# EAGLE board twip-mb-mirror (EAGLE 9.2.2)
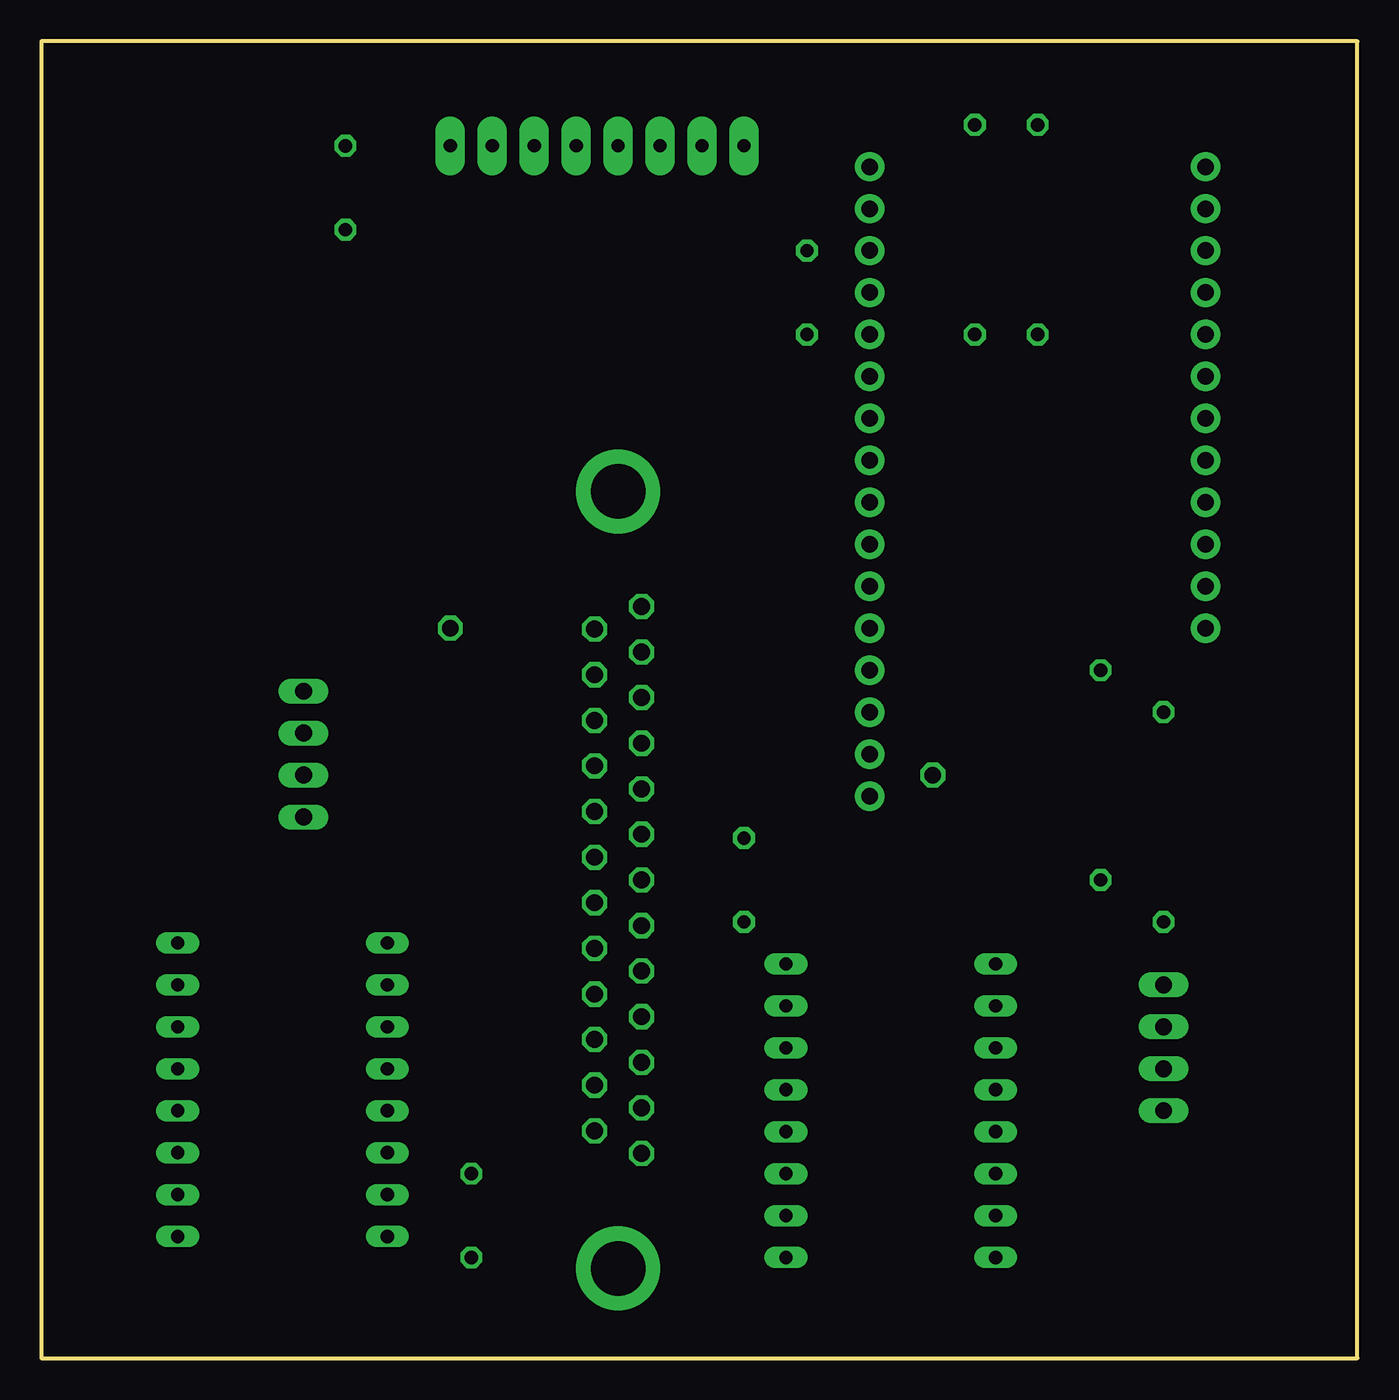
[diagram p0: board, top side]
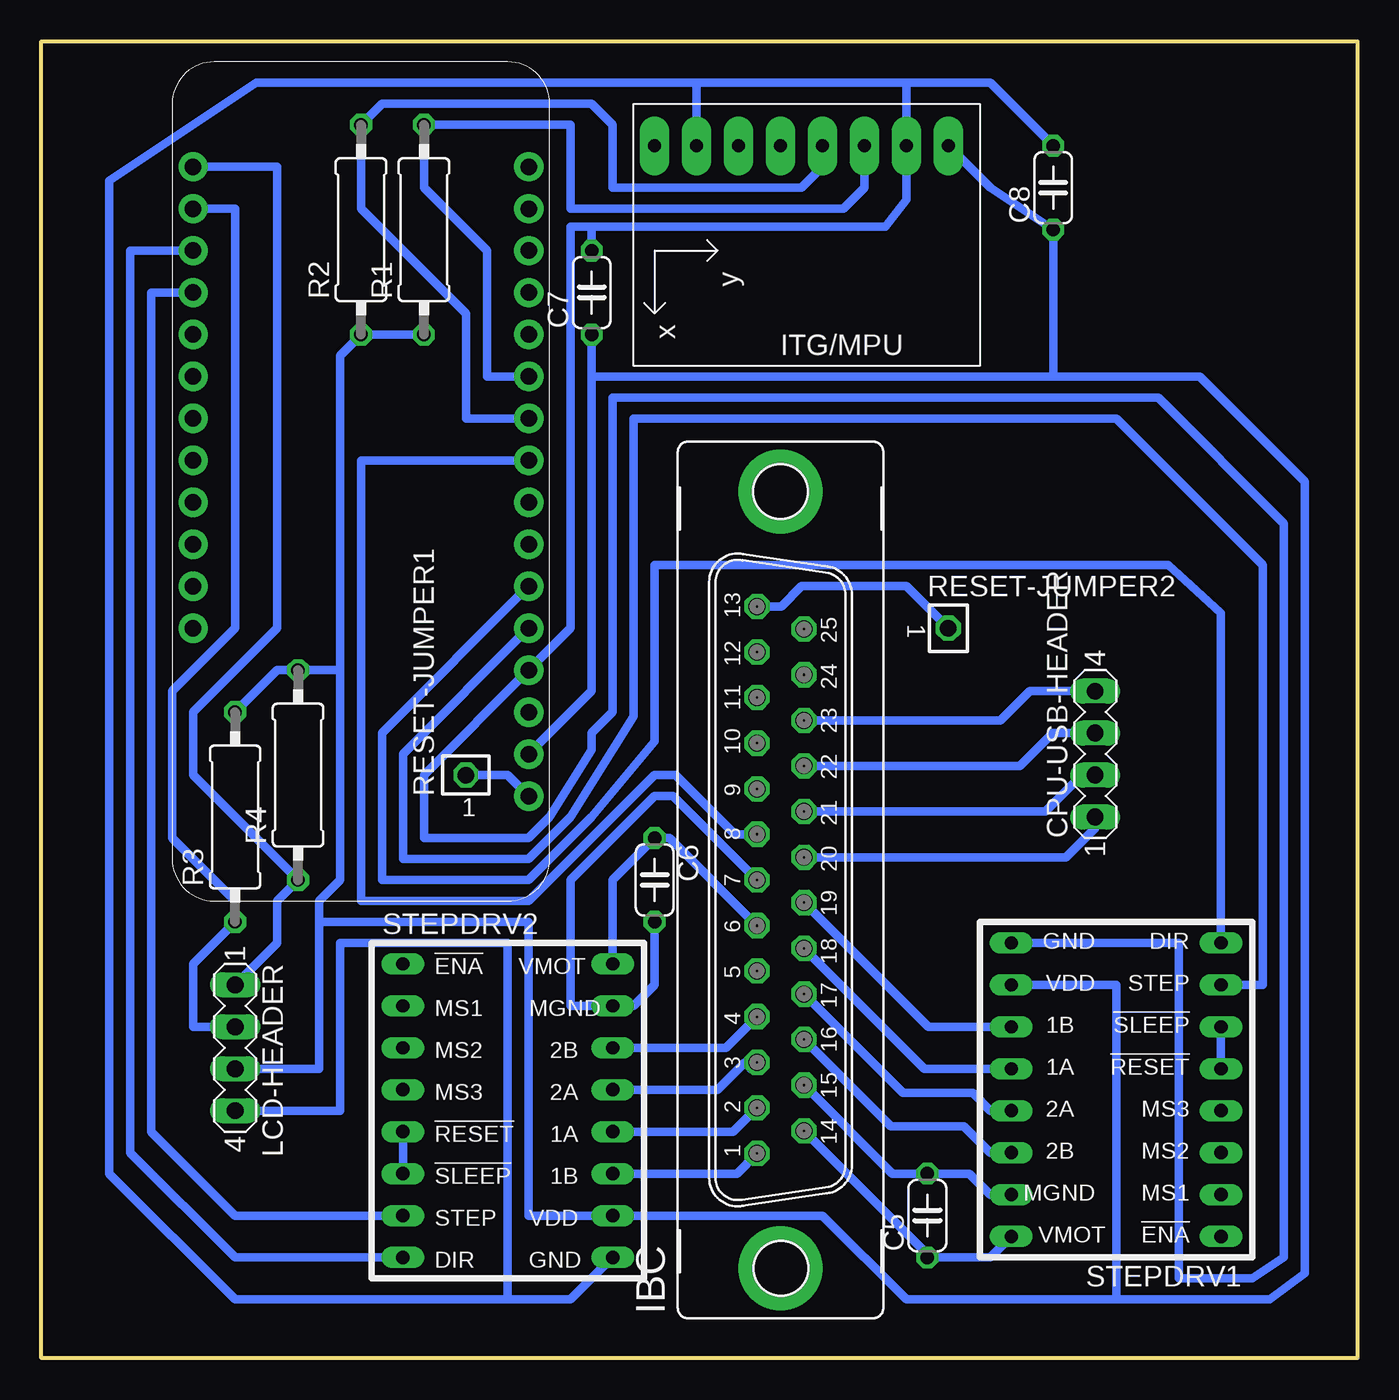
[diagram p1: board, bottom side, seen from below]

Size 79.68 x 79.73 mm. Coordinates in mm from the lower left corner, seen from the top.
Outline: 0,0 79.68,0 79.68,79.73 0,79.73 0,0
Copper layers (1*16): Top 0.035mm / dielectric 1.5mm / Bottom 0.035mm
Design rules "default": minimum track width 6mil, minimum drill 0.35mm, track to track 6mil, track to pad 6mil, pad to pad 6mil, via to via 6mil, smd to smd 6mil, copper to edge 40mil, drill to drill 6mil, minimum pad ring 10mil, minimum via ring 8mil, stop-mask expansion 4mil, vias tented up to drill 0mil, thermal gap 10mil

## Footprints (pad centres in the part's own frame; a part is rotated, then mirrored left to right if it is on the bottom)
C050-024X044 = drill 0.813 octagon: 1 -2.54,0; 2 2.54,0
MA04-1 = drill 1.016 long: 1 -3.81,0; 2 -1.27,0; 3 1.27,0; 4 3.81,0
M25VP = drill 1.016 octagon: 1 -16.561,1.422; 2 -13.792,1.422; 3 -11.049,1.422; 4 -8.28,1.422; 5 -5.512,1.422; 6 -2.769,1.422; 7 0,1.422; 8 2.769,1.422; 9 5.512,1.422; 10 8.28,1.422; 11 11.049,1.422; 12 13.792,1.422; 13 16.561,1.422; 14 -15.189,-1.422; 15 -12.421,-1.422; 16 -9.652,-1.422; 17 -6.909,-1.422; 18 -4.14,-1.422; 19 -1.372,-1.422; 20 1.372,-1.422; 21 4.14,-1.422; 22 6.909,-1.422; 23 9.652,-1.422; 24 12.421,-1.422; 25 15.189,-1.422 | drill 3.302 pad 5.08: G1 -23.52,0; G2 23.52,0
FEATHERWING_NOHOLES = drill 1 pad 1.778: 1 6.35,1.27; 2 8.89,1.27; 3 11.43,1.27; 4 13.97,1.27; 5 16.51,1.27; 6 19.05,1.27; 7 21.59,1.27; 8 24.13,1.27; 9 26.67,1.27; 10 29.21,1.27; 11 31.75,1.27; 12 34.29,1.27; 13 36.83,1.27; 14 39.37,1.27; 15 41.91,1.27; 16 44.45,1.27; 17 44.45,21.59; 18 41.91,21.59; 19 39.37,21.59; 20 36.83,21.59; 21 34.29,21.59; 22 31.75,21.59; 23 29.21,21.59; 24 26.67,21.59; 25 24.13,21.59; 26 21.59,21.59; 27 19.05,21.59; 28 16.51,21.59
0309/12 = drill 0.813 octagon: 1 -6.35,0; 2 6.35,0
TSW-101-XX-G-S = drill 1 pad 1.5 octagon: 1 0,0
POLOLULU2128 = drill 0.8 long: 1 -7.62,7.62; 2 -7.62,5.08; 3 -7.62,2.54; 4 -7.62,0; 5 -7.62,-2.54; 6 -7.62,-5.08; 7 -7.62,-7.62; 8 -7.62,-10.16; 9 5.08,-10.16; 10 5.08,-7.62; 11 5.08,-5.08; 12 5.08,-2.54; 13 5.08,0; 14 5.08,2.54; 15 5.08,5.08; 16 5.08,7.62
GY-521 = drill 0.8 pad 1.778 long: ADO -8.89,-6.35; GND -8.89,6.35; INT -8.89,-8.89; SCL -8.89,3.81; SDA -8.89,1.27; VCC -8.89,8.89; XCL -8.89,-3.81; XDA -8.89,-1.27

## Placement (x,y rotation side)
C5  [C050-024X044]  26.04,8.64 90 bottom
C6  [C050-024X044]  42.55,28.96 270 bottom
C7  [C050-024X044]  46.35,64.52 90 bottom
C8  [C050-024X044]  18.41,70.87 90 bottom
CPU-USB-HEADER  [MA04-1]  15.88,36.58 90 bottom
IBC  [M25VP]  34.92,28.96 90 bottom
LCD-HEADER  [MA04-1]  67.94,18.8 270 bottom
MS2  FEATHERWING_NOHOLES  [FEATHERWING_NOHOLES]  48.9,27.69 90 bottom
R1  2K2  [0309/12]  56.52,68.33 90 bottom
R2  2K2  [0309/12]  60.33,68.33 90 bottom
R3  2K2  [0309/12]  67.94,32.77 90 bottom
R4  2K2  [0309/12]  64.14,35.31 90 bottom
RESET-JUMPER1  TSW-101-07-G-S  [TSW-101-XX-G-S]  53.98,35.31 0 bottom
RESET-JUMPER2  TSW-101-07-G-S  [TSW-101-XX-G-S]  24.77,44.2 270 bottom
STEPDRV1  POLOLULU2128  [POLOLULU2128]  15.88,14.99 180 bottom
STEPDRV2  POLOLULU2128  [POLOLULU2128]  50.16,16.26 0 bottom
U1  GY-521MPU6050  [GY-521]  33.66,64.52 270 bottom

## Library data of the parts
C5-C8 = rcl; SPICEPREFIX: C
CPU-USB-HEADER LCD-HEADER = con-lstb; OC_FARNELL: unknown; OC_NEWARK: unknown
IBC = con-subd; OC_FARNELL: unknown; OC_NEWARK: unknown
MS2 = microbuilder
R1-R4 = resistor
RESET-JUMPER1 RESET-JUMPER2 = con-samtec; MF: Samtec Inc.; MPN: TSW-101-07-G-S
STEPDRV1 STEPDRV2 = stepper_drivers_etc
U1 = gy-521

## Nets
3V: C7.1 C8.1 LCD-HEADER.3 MS2.2 R1.1 R2.1 R3.2 R4.2 STEPDRV1.10 STEPDRV2.10 U1.VCC
N$1: IBC.13 RESET-JUMPER2.1
N$2: C6.2 IBC.7 STEPDRV2.15
N$3: IBC.16 STEPDRV1.14
N$4: IBC.17 STEPDRV1.13
N$5: MS2.5 STEPDRV1.7
N$6: IBC.18 STEPDRV1.12
N$7: IBC.19 STEPDRV1.11
N$8: IBC.1 STEPDRV2.11
N$9: IBC.2 STEPDRV2.12
N$10: IBC.3 STEPDRV2.13
N$11: LCD-HEADER.2 MS2.18 R3.1
N$12: IBC.4 STEPDRV2.14
N$13: CPU-USB-HEADER.4 IBC.23
N$14: CPU-USB-HEADER.3 IBC.22
N$15: MS2.6 STEPDRV1.8
N$16: MS2.1 RESET-JUMPER1.1
N$17: MS2.11 R1.2 U1.SCL
N$18: CPU-USB-HEADER.2 IBC.21
N$19: LCD-HEADER.1 MS2.17 R4.1
N$20: C5.2 IBC.15 STEPDRV1.15
N$21: C6.1 IBC.6 STEPDRV2.16
N$22: C5.1 IBC.14 STEPDRV1.16
N$23: STEPDRV1.5 STEPDRV1.6
N$24: STEPDRV2.5 STEPDRV2.6
N$25: MS2.10 R2.2 U1.SDA
N$27: MS2.19 STEPDRV2.8
N$28: IBC.8 MS2.9
N$29: MS2.20 STEPDRV2.7
N$30: CPU-USB-HEADER.1 IBC.20
N$35: C7.2 C8.2 LCD-HEADER.4 MS2.4 STEPDRV1.9 STEPDRV2.9 U1.ADO U1.GND

## Tracks (layer width: path | path; a pad name or v marks a point on that pad's centre or on a via)
3V
  Bottom 0.508: MS2.2 46.35,40.39 46.35,59.44 | STEPDRV1.10 14.61,22.61 14.61,3.56 | 14.61,3.56 5.29,3.56 3.17,5.14 3.17,53.09 9.53,59.44 18.41,59.44 | 46.35,59.44 18.41,59.44 | 14.61,3.56 27.3,3.56 32.38,8.64 STEPDRV2.10 50.16,8.64 50.16,26.42 62.87,26.42 | LCD-HEADER.3 62.87,17.53 62.87,26.42 | U1.VCC 22.23,70.87 C8.1 18.41,59.44 | C7.1 46.35,59.44 | 61.59,41.66 61.59,28.96 62.87,27.69 62.87,26.42 | 61.59,41.66 61.59,60.71 R2.1 R1.1 | R3.2 65.41,41.66 R4.2 61.59,41.66
N$1
  Bottom 0.508: IBC.13 34.87,45.52 33.66,46.74 27.3,46.74 RESET-JUMPER2.1
N$2
  Bottom 0.508: IBC.7 41.43,34.04 42.55,34.04 47.62,28.96 47.62,21.34 STEPDRV2.15 43.81,21.34 42.55,22.61 C6.2
N$3
  Bottom 0.508: IBC.16 28.25,14.05 23.82,14.05 22.23,12.45 STEPDRV1.14
N$4
  Bottom 0.508: IBC.17 27.51,16.05 23.29,16.05 22.23,14.99 STEPDRV1.13
N$5
  Bottom 0.508: STEPDRV1.7 5.71,22.61 5.71,48.01 14.61,56.9 43.81,56.9 43.81,38.86 47.62,32.77 50.16,30.23 57.78,30.23 57.78,36.58 MS2.5
N$6
  Bottom 0.508: IBC.18 26.21,17.53 STEPDRV1.12
N$7
  Bottom 0.508: IBC.19 25.98,20.07 STEPDRV1.11
N$8
  Bottom 0.508: 36.4,12.45 IBC.1 37.57,11.18 STEPDRV2.11
N$9
  Bottom 0.508: 36.52,14.99 IBC.2 37.8,13.72 STEPDRV2.12
N$10
  Bottom 0.508: 36.73,17.53 IBC.3 37.08,17.91 38.73,16.26 STEPDRV2.13
N$11
  Bottom 0.508: 66.67,20.07 LCD-HEADER.2 70.48,20.07 70.48,23.88 R3.1 67.94,27.69 71.75,31.5 71.75,40.39 67.94,44.2 67.94,69.6 MS2.18
N$12
  Bottom 0.508: IBC.4 38.23,18.8 STEPDRV2.14
N$13
  Bottom 0.508: IBC.23 21.6,38.61 19.82,40.39 CPU-USB-HEADER.4
N$14
  Bottom 0.508: IBC.22 20.42,35.87 18.44,37.85 CPU-USB-HEADER.3
N$15
  Bottom 0.508: STEPDRV1.8 8.26,45.12 10.45,47.12 11.43,48.01 42.55,48.01 42.55,37.34 46.35,32.77 50.16,28.96 59.05,28.96 59.05,37.85 MS2.6
N$16
  Bottom 0.508: RESET-JUMPER1.1 51.44,35.31 MS2.1
N$17
  Bottom 0.508: U1.SCL 29.84,70.87 31.11,69.6 47.62,69.6 47.62,74.68 R1.2 56.52,70.87 52.7,67.06 52.7,59.44 MS2.11
N$18
  Bottom 0.508: IBC.21 18.9,33.1 16.69,35.31 CPU-USB-HEADER.2
N$19
  Bottom 0.508: MS2.17 65.41,72.14 65.41,44.2 70.48,39.12 70.48,35.31 R4.1 65.41,27.69 65.41,25.15 LCD-HEADER.1
N$20
  Bottom 0.508: IBC.15 28.14,11.18 C5.2 23.5,11.18 22.23,9.91 STEPDRV1.15
N$21
  Bottom 0.508: STEPDRV2.16 45.09,28.96 C6.1 41.66,31.5 IBC.6
N$22
  Bottom 0.508: IBC.14 26.04,6.3 C5.1 22.23,6.1 STEPDRV1.16
N$23
  Bottom 0.508: STEPDRV1.6 STEPDRV1.5
N$24
  Bottom 0.508: STEPDRV2.5 STEPDRV2.6
N$25
  Bottom 0.508: U1.SDA 32.38,72.14 33.66,70.87 45.09,70.87 45.09,74.68 46.35,75.95 59.05,75.95 R2.2 60.33,69.6 53.98,63.25 53.98,56.9 MS2.10
N$27
  Bottom 0.508: MS2.19 74.3,67.06 74.3,12.45 67.94,6.1 STEPDRV2.8
N$28
  Bottom 0.508: IBC.8 37.69,31.73 41.27,35.31 42.55,35.31 50.16,27.69 60.33,27.69 60.33,54.36 MS2.9
N$29
  Bottom 0.508: MS2.20 73.03,64.52 73.03,13.72 67.94,8.64 STEPDRV2.7
N$30
  Bottom 0.508: IBC.20 17.66,30.33 15.88,32.11 CPU-USB-HEADER.1
N$35
  Bottom 0.508: 27.3,77.22 U1.GND 27.3,70.14 28.57,68.51 46.35,68.51 | 46.35,68.51 47.62,68.51 47.62,44.2 MS2.4 56.52,35.31 56.52,31.5 50.16,31.5 48.9,32.77 46.35,36.83 46.35,37.85 45.09,39.12 45.09,58.17 12.06,58.17 4.45,50.55 4.45,6.1 6.35,4.83 10.79,4.83 10.79,25.15 STEPDRV1.9 | 27.3,77.22 40.01,77.22 | 40.01,77.22 66.67,77.22 75.56,71.29 75.56,11.18 67.94,3.56 51.44,3.56 | 51.44,3.56 47.62,3.56 STEPDRV2.9 | LCD-HEADER.4 61.59,14.99 61.59,25.15 51.44,25.15 51.44,3.56 | U1.ADO 40.01,77.22 | C8.2 22.23,77.22 27.3,77.22 | C7.2 46.35,68.51